# Altium PCB LPCOExtended.PcbDoc
Units mil, origin at the board's own origin, x right, y up, seen from the top; angles counter-clockwise.
Board outline 1970 x 1970 mil, 2 copper layers (Top Layer, Bottom Layer); 25 components, 29 nets, 93 pads, 23 vias.
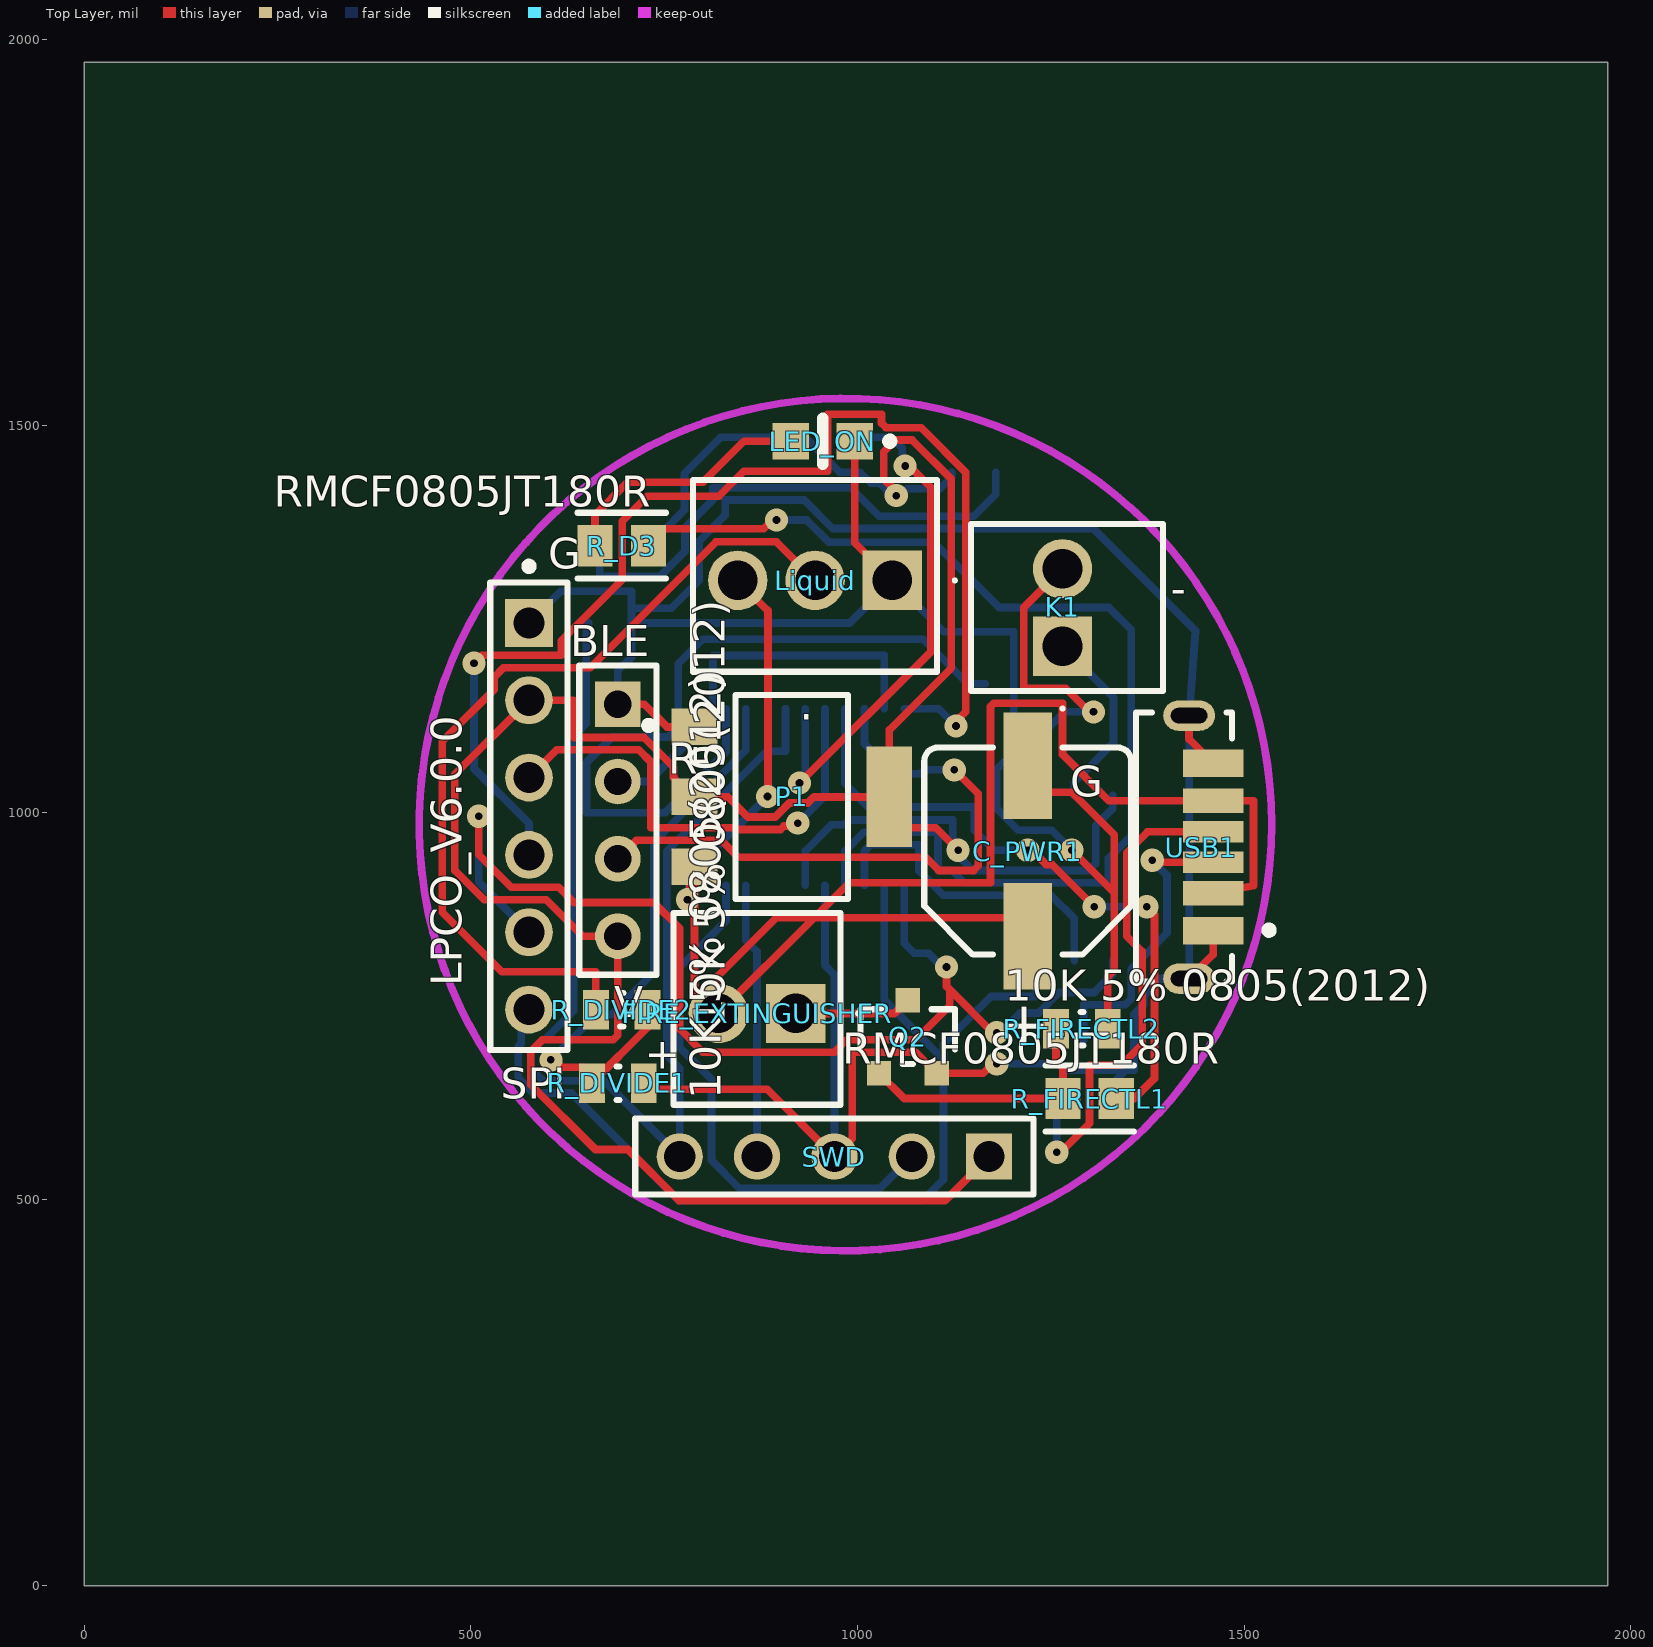
[diagram p0: Top Layer view]
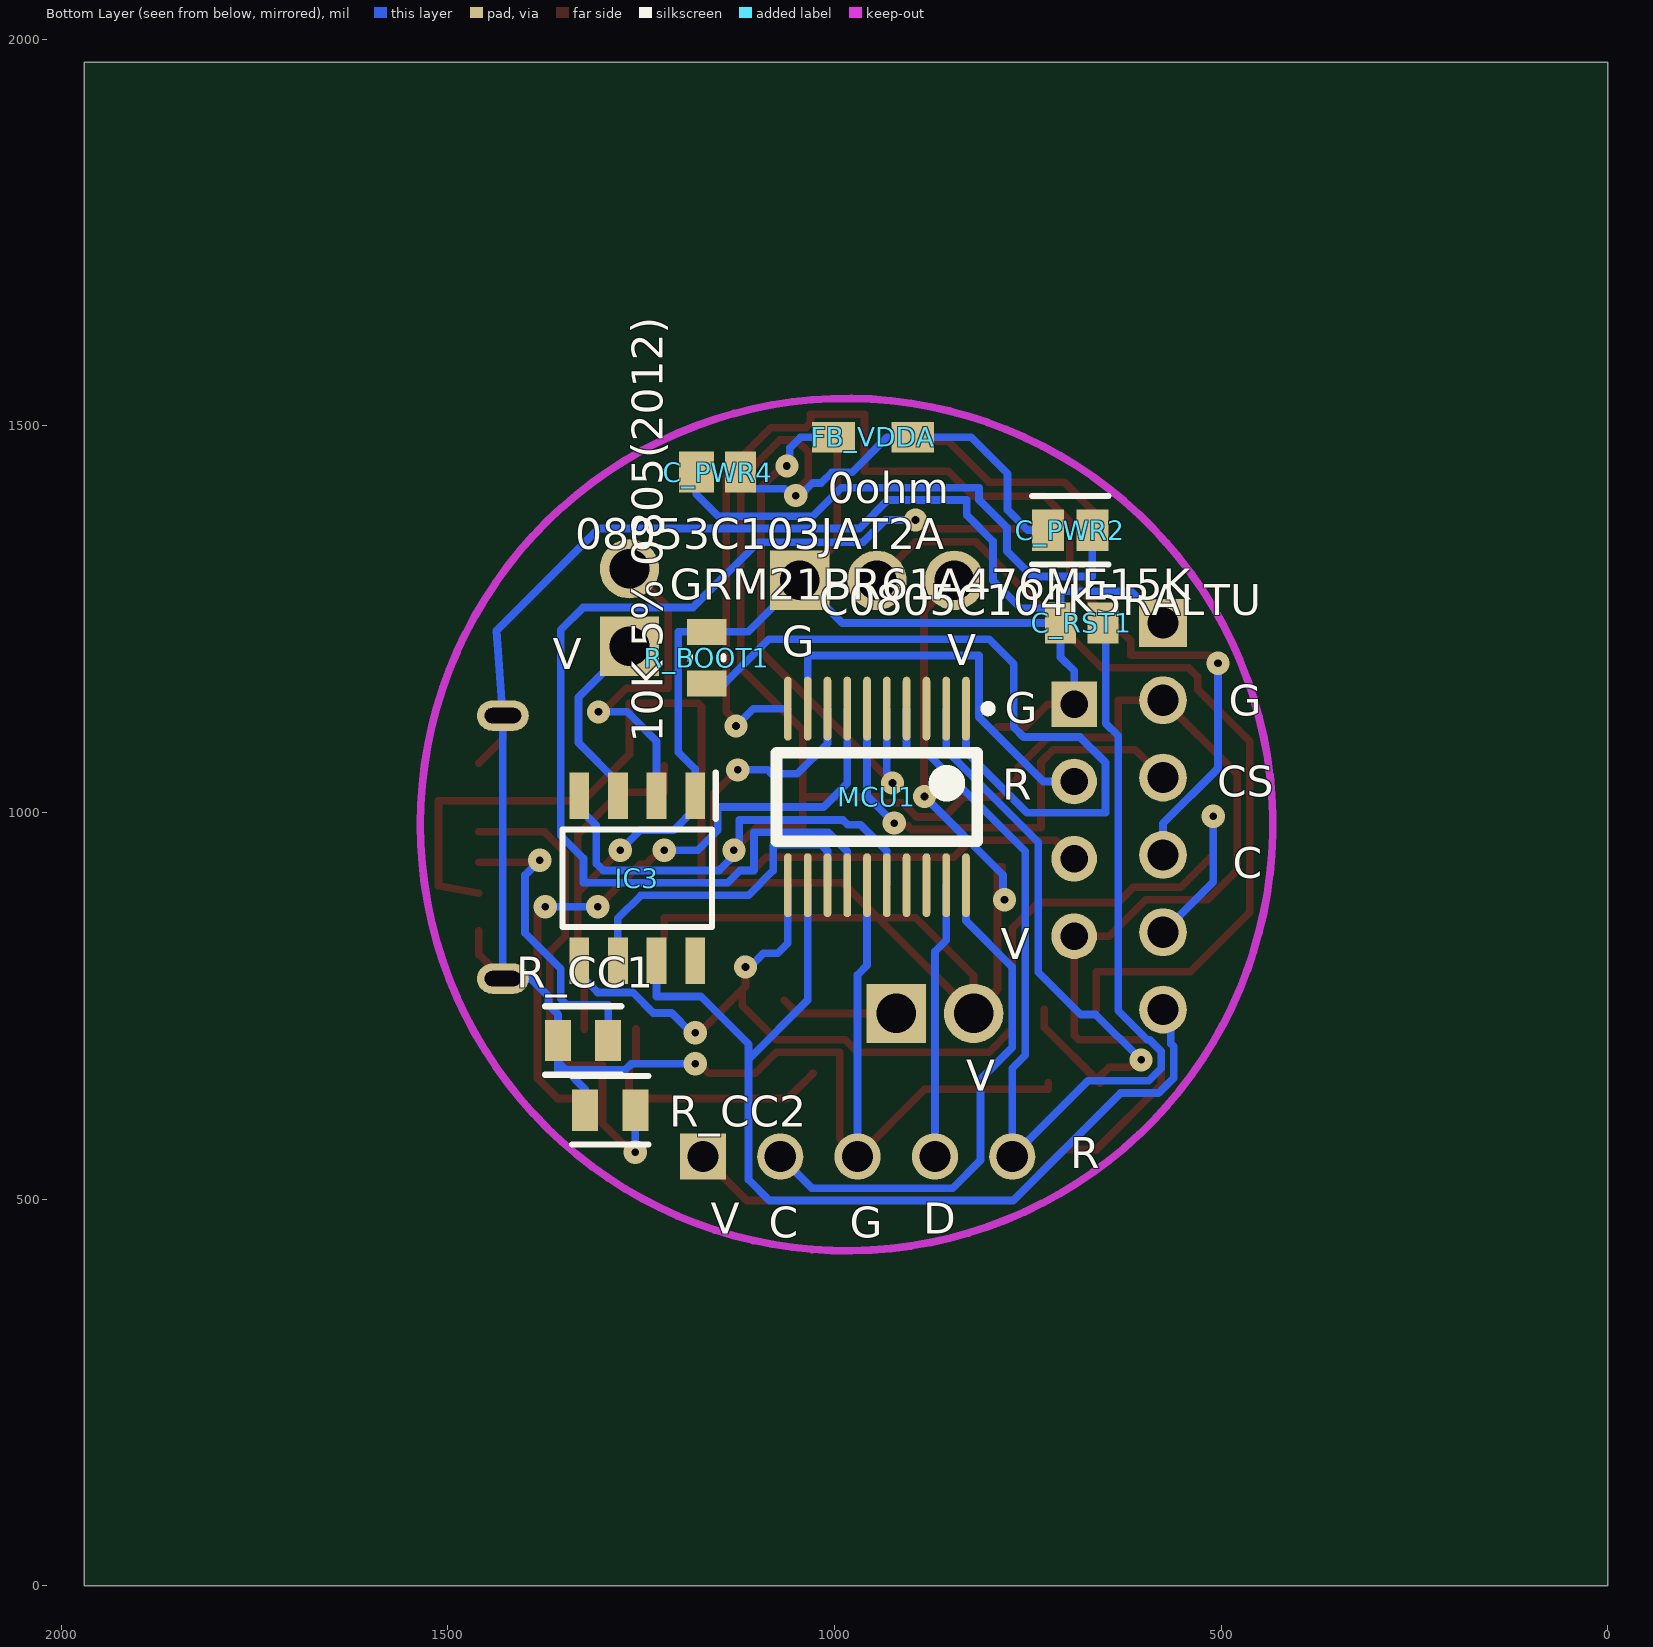
[diagram p1: Bottom Layer view, seen from below]
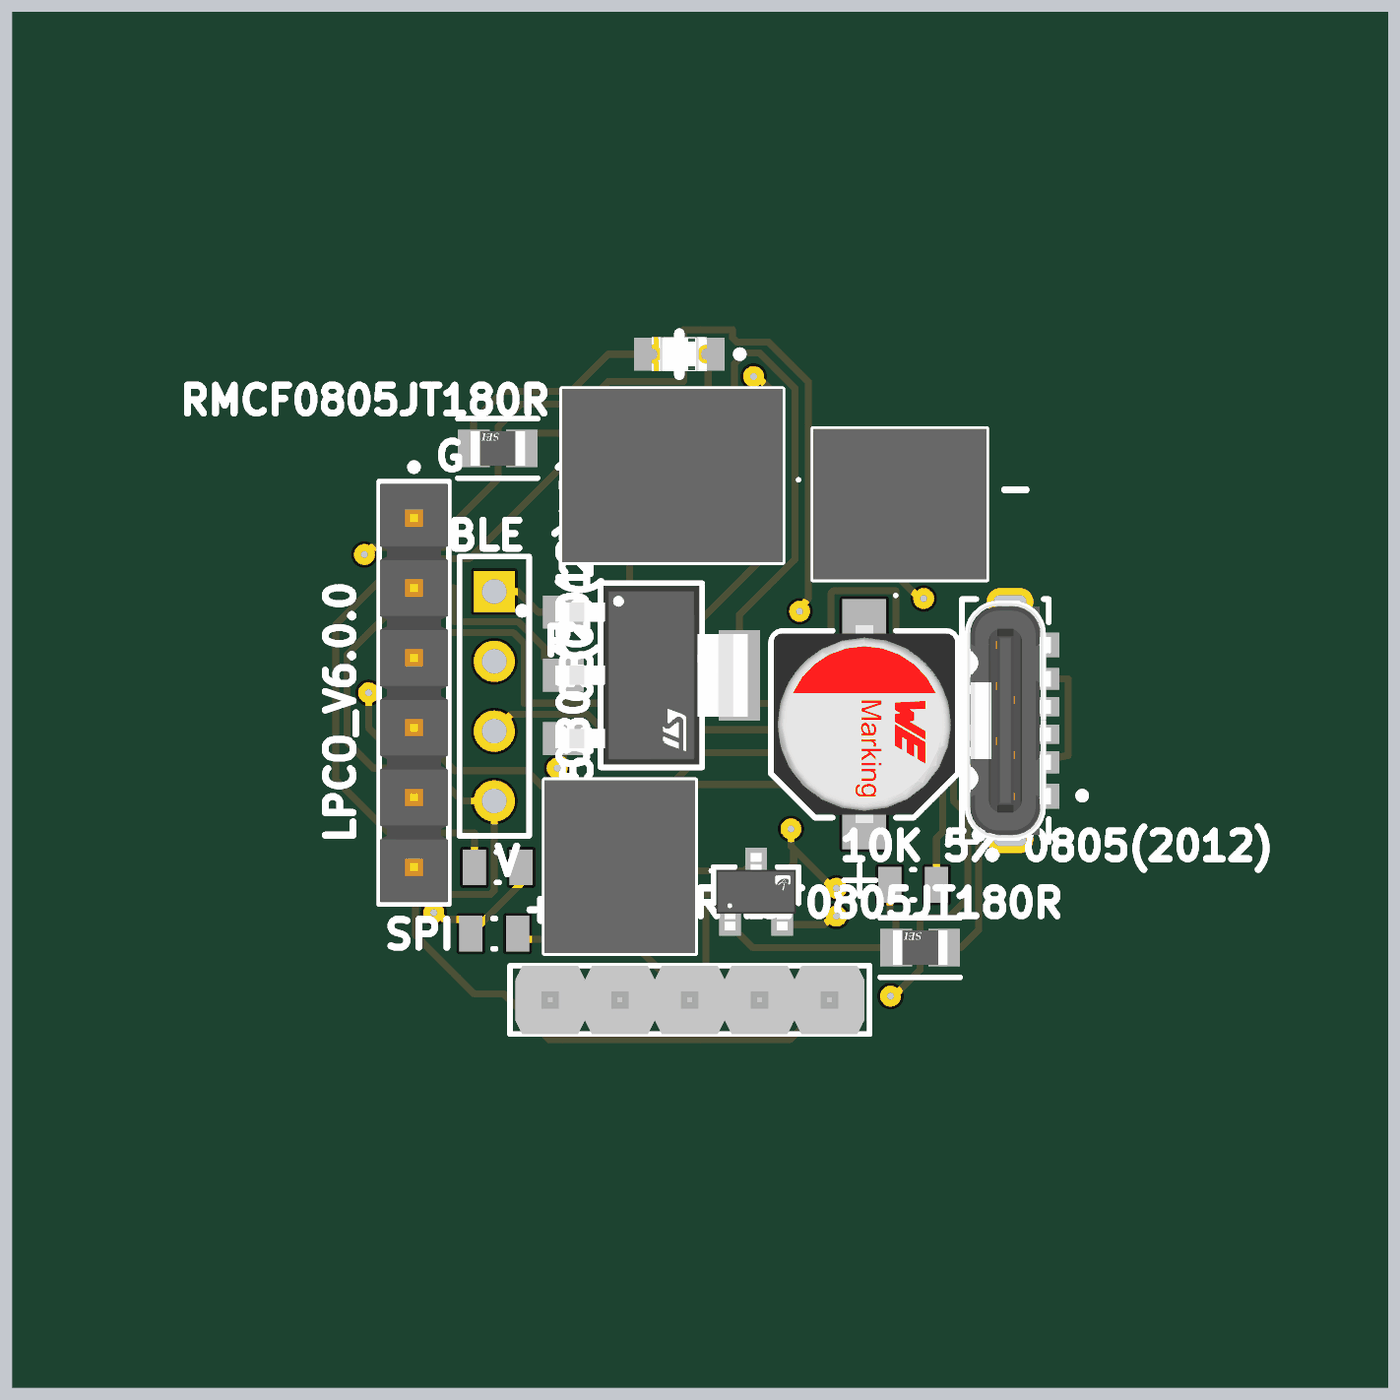
[diagram p2: 3D render of the assembled board from above, using the file's embedded part models]
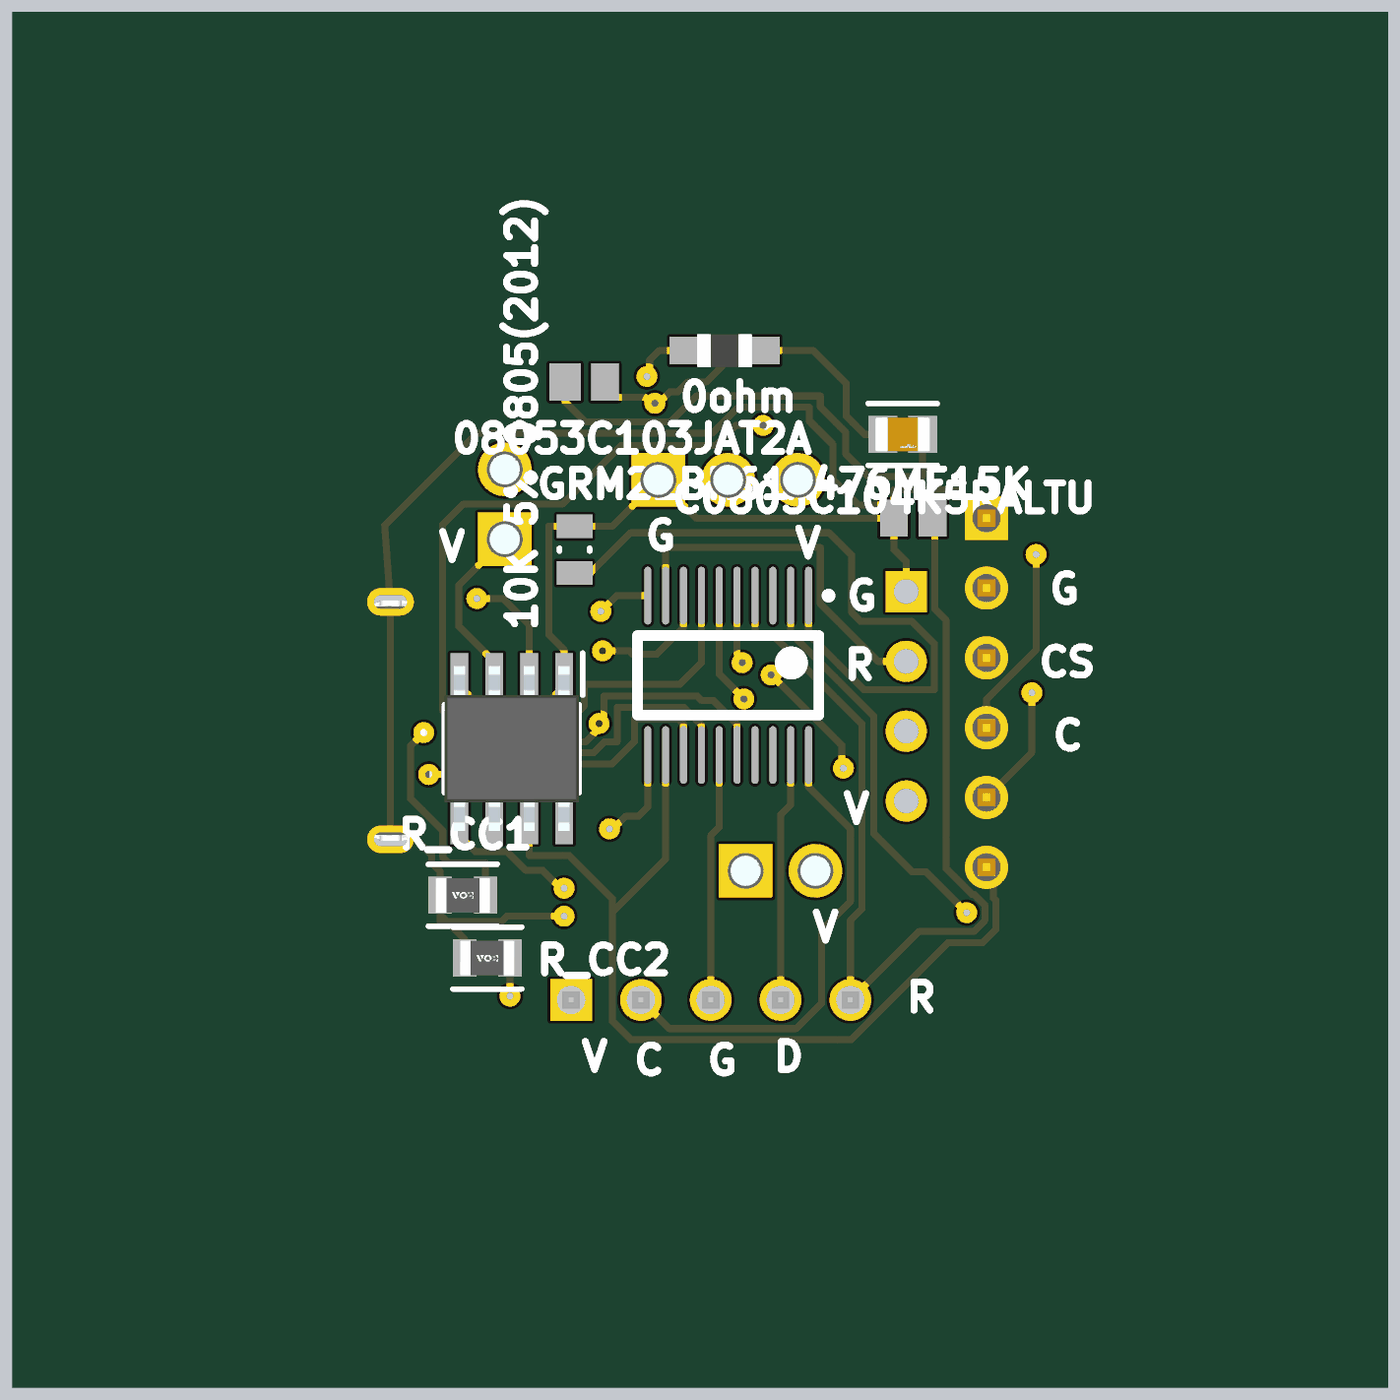
[diagram p3: 3D render of the assembled board from below, using the file's embedded part models]

## Layer stack, top to bottom
Top Solder: solder mask 0.4, Solder Resist, Dk 3.5
Top Layer: signal copper 1.4
Dielectric 1: dielectric 12.6, FR-4, Dk 4.8
Bottom Layer: signal copper 1.4
Bottom Solder: solder mask 0.4, Solder Resist, Dk 3.5

## Board outline
0,0 1970,0 1970,1970 0,1970

## Design rules (kind name [scope] priority, off if disabled: settings)
Clearance [All] p1: gap=6 ignorepadtopadclearanceinfootprint=FALSE except(10: Via-Via; 25: SMDPad-Via THPad-Via)
HoleSize [All] p1: absolutevalues=TRUE maxlimit=100 minlimit=6 maxpercent=80.000 minpercent=20.000
PolygonConnect [All] p1: connectstyle=Relief reliefconductorwidth=10 reliefentries=4 polygonreliefangle="90 Angle" airgapwidth=10
RoutingVias [All] p1: holewidth=10 width=30 viastyle="Through Hole" minholewidth=10 minwidth=30 maxholewidth=28 maxwidth=50
SolderMaskExpansion [All] p1: expansion=4 istentingtop=FALSE
Width [All] p1: maxlimit=30 minlimit=10 preferedwidth=10
29 further rules are at their usual default settings.

## Components (designator, comment, footprint, x,y, rotation, side; value= is the part's Value field where it differs from the comment)
BLE "Header BLE" HDR1X4 690,1140 r270 top
C_PWR1 "875585345004" WCAP-HSAH_D6.3H7.7 1220,950 r270 top
C_PWR2 "GRM21BR61A476ME15K" FP-GRM21B-0_2-e0_2_0_7-IPC_C 695,1365 r180 bottom
C_PWR4 "08053C103JAT2A" CAPC2013X94X50LL20T25 1150,1440 r180 bottom
C_RST1 "C0805C104K5RALTU" CAPC2013X88X50LL20T25 680,1245 r180 bottom
FB_VDDA "0ohm" WE-CBF_0805_L2W1.2H0.9_HC 950,1485 r180 bottom
FIRE_EXTINGUISHER "KF128-2.54-2P" KF1282542P 920,740 r180 top
IC3 "MAX31855JASA+" SOIC127P600X175-8N 1255,915 r270 bottom
K1 "KF128-2.54-2P" KF1282542P 1265,1215 r90 top
LED_ON "WHITE LED 3.0v20ma" FP-SML-LX0805UWC-TR-MFG 955,1480 r180 top
Liquid "KF128-2.54-3P" KF1282543P 1045,1300 r180 top
MCU1 "STM32F031F6P6TR" STM-TSSOP20_M 945,1020 r270 bottom
P1 "LD1117S33" FP-SOT-223-0046067_14-MFG 915,1020 r0 top
Q2 "AO3400A" FP-SOT23-MFG 1065,710 r90 top
R_BOOT1 "10K 5% 0805(2012)" RESC0805(2012)_L 1165,1200 r270 bottom value="10000.00 Ohm"
R_CC1 "RN73R2ATTD5101A05" FP-RN73R2A-IPC_C 1325,705 r0 bottom
R_CC2 "RN73R2ATTD5101A05" FP-RN73R2A-IPC_C 1290,615 r0 bottom
R_D3 "RMCF0805JT180R" FP-RMCF0805-IPC_B 695,1345 r180 top
R_DIVIDE1 "10K 5% 0805(2012)" RESC0805(2012)_L 690,650 r180 top value="10000.00 Ohm"
R_DIVIDE2 "10K 5% 0805(2012)" RESC0805(2012)_L 695,745 r180 top value="10000.00 Ohm"
R_FIRECTL1 "RMCF0805JT180R" FP-RMCF0805-IPC_B 1300,630 r180 top
R_FIRECTL2 "10K 5% 0805(2012)" RESC0805(2012)_L 1290,720 r180 top value="10000.00 Ohm"
SPI "HTSW-106-07-G-S" FP-HTSW-106-07-G-S-MFG 575,995 r270 top
SWD "MTLW-105-05-T-S-190" SMTC-MTLW-105-05-X-S-190 1170,555 r180 top
USB1 "217178-0001" FP-217178-0001-MFG 1422.01,955.16 r270 top

## Footprints (in the part's own frame and the unit in brackets; to place one, negate y for a bottom-side part, rotate by r counter-clockwise, add the part's x,y. Pads: shape width x height; smd on the part's side, far side on the other; paste and mask are expansions set on the pad)
CAPC2013X88X50LL20T25 [mil] "Chip Capacitor, 2-Leads, Body 2.00x1.25mm, IPC High Density"
  rect 40x53.15 smd: 1(-27.56,0) 2(27.56,0)
  body extent -43,-29 43,29, height 35
CAPC2013X94X50LL20T25 [mm] "Chip Capacitor, 2-Leads, Body 2.01x1.25mm, IPC High Density"
  rect 1.15x1.35 smd: 1(-0.725,0)
  rect 1.016x1.35 smd: 2(0.725,0)
  body extent -1.1,-0.72 1.1,0.72, height 0.94
FP-217178-0001-MFG [mm]
  rrect100% 1x1.7 hole 1.2 slot 0.5 at 0 deg paste-1000 mask+0: 1(-4.32,0.17) 2(4.32,0.17)
  rect 0.7x1.99 smd paste+0 mask+0: A5(0.5,0.965) B5(-0.5,0.965)
  rect 0.8x1.99 smd paste+0 mask+0: A9(-1.52,0.965) B9(1.52,0.965)
  rect 0.9x1.99 smd paste+0 mask+0: A12(-2.75,0.965) B12(2.75,0.965)
  silkscreen extent -4.42,-1.58 4.42,2.92, body extent -4.92,-1.68 4.92,2.06, height 0.25
FP-GRM21B-0_2-e0_2_0_7-IPC_C [mil]
  rect 41.52x53.39 smd paste+0 mask+0: 1(-28.57,0) 2(28.57,0)
  silkscreen extent -49,-44 49,44, body extent -39,-25 39,25, height 57
FP-HTSW-106-07-G-S-MFG [mm]
  rect 1.57x1.57 hole 1.02 paste-1000 mask+0: 1(-6.35,0)
  round 1.57 hole 1.02 paste-1000 mask+0: 2(-3.81,0) 3(-1.27,0) 4(1.27,0) 5(3.81,0) 6(6.35,0)
  silkscreen extent -8.33,-1.27 7.68,1.27, body extent -7.78,-1.37 7.78,1.37, height 0.25
FP-RMCF0805-IPC_B [mil]
  rect 45.46x53.63 smd paste+0 mask+0: 1(-34.48,0) 2(34.48,0)
  silkscreen extent -57,-43 57,43, body extent -67,-37 67,37, height 10
FP-RN73R2A-IPC_C [mil]
  rect 33.67x53.39 smd paste+0 mask+0: 1(-32.5,0) 2(32.5,0)
  silkscreen extent -49,-44 49,44, body extent -39,-25 39,25, height 24
FP-SML-LX0805UWC-TR-MFG [mm]
  rect 1.2x1.2 smd paste+0 mask+0: 1(-1.05,0) 2(1.05,0)
  silkscreen extent -2.33,-0.75 0,0.75, body extent -1.75,-0.85 1.75,0.85, height 0.25
FP-SOT23-MFG [mm]
  rect 0.8x0.8 smd paste+0 mask+0: 1(-1.2,0.95) 2(-1.2,-0.95) 3(1.2,0)
  silkscreen extent -0.9,-1.55 0.9,1.55, body extent -1.7,-1.78 1.7,1.78, height 0.25
FP-SOT-223-0046067_14-MFG [mm]
  rect 1.5x1.2 smd paste+0 mask+0: 1(-3.2,2.3) 2(-3.2,0) 3(-3.2,-2.3)
  rect 1.5x3.3 smd paste+0 mask+0: 4(3.2,0)
  silkscreen extent -4.82,-3.35 1.85,3.35, body extent -4.05,-3.45 4.05,3.45, height 0.25
HDR1X4 [mm] "Connector; Header; 4 Position"
  rect 1.5x1.5 hole 0.9: 1(0,0)
  round 1.5 hole 0.9: 2(2.54,0) 3(5.08,0) 4(7.62,0)
  silkscreen extent -1.27,-1.27 8.89,1.27
KF1282542P [mm]
  rect 1.95x1.95 hole 1.3: 1(0,0)
  round 1.95 hole 1.3: 2(2.54,0)
  silkscreen extent -2.1,-3.3 4.01,3, body extent -1.47,-3.3 4.01,3, height 9.2
KF1282543P [mm]
  rect 1.95x1.95 hole 1.3: 1(0,0)
  round 1.95 hole 1.3: 2(2.54,0) 3(5.08,0)
  silkscreen extent -2.1,-3.3 6.55,3, body extent -1.47,-3.3 6.55,3, height 9.2
RESC0805(2012)_L [mm] "Chip Resistor, Body 2.0x1.3mm, IPC High Density"
  rect 0.85x1.3 smd: 1(-0.85,0) 2(0.85,0)
  silkscreen extent -0.05,-0.55 0.05,0.55, body extent -1.1,-0.67 1.1,0.68, height 0.7
SMTC-MTLW-105-05-X-S-190 [mm] "Terminal Assembly, 1x5 Pins, Vertical, 2.54mm Pitch, Male"
  rect 1.52x1.52 hole 1.02: 1(0,0)
  round 1.52 hole 1.02: 2(2.54,0) 3(5.08,0) 4(7.62,0) 5(10.16,0)
  silkscreen extent -1.46,-1.24 11.62,1.24, body extent -1.27,-1.24 11.43,1.24, height 6.35
SOIC127P600X175-8N [mm]
  rect 1.525x0.65 smd: 1(-2.712,1.905) 2(-2.712,0.635) 3(-2.712,-0.635) 4(-2.712,-1.905) 5(2.712,-1.905) 6(2.712,-0.635) 7(2.712,0.635) 8(2.712,1.905)
  silkscreen extent -3.47,-2.45 1.6,2.58, body extent -3,-2.45 3,2.45, height 1.75
STM-TSSOP20_M [mm] "SOP, 20-Leads, Body 6.6x4.5mm, Pitch 0.65mm, IPC Low Density"
  oval 2.1x0.254 smd: 1(-2.9,2.925) 2(-2.9,2.275) 3(-2.9,1.625) 4(-2.9,0.975) 5(-2.9,0.325) 6(-2.9,-0.325) 7(-2.9,-0.975) 8(-2.9,-1.625) 9(-2.9,-2.275) 10(-2.9,-2.925) 11(2.9,-2.925) 12(2.9,-2.275) 13(2.9,-1.625) 14(2.9,-0.975) 15(2.9,-0.325) 16(2.9,0.325) 17(2.9,0.975) 18(2.9,1.625) 19(2.9,2.275) 20(2.9,2.925)
  silkscreen extent -3.02,-3.3 1.45,3.77, body extent -2.25,-3.3 2.25,3.3, height 1.2
WCAP-HSAH_D6.3H7.7 [mm] "Aluminum Hybrid Polymer Capacitor, SMT, body diameter 6.3mm"
  rect 3.5x1.6 smd: 1(2.8,0) 2(-2.8,0)
  silkscreen extent -3.4,-3.4 3.4,3.4, body extent -3.6,-3.3 3.6,3.3, height 7.75
WE-CBF_0805_L2W1.2H0.9_HC [mm] "SMD EMI Suppression Ferrite  Bead, body 2.00x1.20mm"
  rect 1.4x1 smd: 1(-1.3,0) 2(1.3,0)
  body extent -1,-0.6 1,0.6, height 0.9

## Part data
BLE: library part "Header 4", "Header, 4-Pin", LatestRevisionDate=17-Jul-2002, LatestRevisionNote="Re-released for DXP Platform.", Publisher="Altium Limited"
C_PWR1: library part CMP-03913-134709175-2, "Cap, 220Uf, 16V, Alu Elec, Hybrid, Smd Rohs Compliant: Yes", Capacitance=220µF, ESR (Equivalent Series Resistance)=30mΩ, Leakage Current=35.2µA, Max Operating Temperature=125°C, Min Operating Temperature=-55°C, Ripple Current=1.4A, Voltage Rating=16V, Diameter=6.3mm, Length=7.7mm, RoHS=Compliant, Width=6.5mm
C_PWR2: library part CMP-06035-042633-1, "Chip Multilayer Ceramic Capacitors for General Purpose, 0805, 47uF, X5R, 15%, 20%, 10V", Capacitance=47uF, Case Code (Imperial)=0805, Case Code (Metric)=2012, Dielectric=X5R, Max Operating Temperature=85°C, Min Operating Temperature=-55°C, Package Quantity=10000, Tolerance=20%, Voltage Rating=10V, Case/Package=0805, Length=0.079inch, Mount="Surface Mount", Packaging="Tape and Reel", Termination=SMD/SMT, Thickness=0.057inch, Voltage Rating (DC)=10V, Weight=0.000335oz, Width=0.049inch
C_PWR4: library part CMP-2007-04234-1, Manufacturer="AVX Interconnect / Elco", Part Number=08053C103JAT2A
C_RST1: library part CMP-2007-00280-1, Manufacturer=Kemet, Part Number=C0805C104K5RALTU
FB_VDDA: library part CMP-0220-00029-2, Case Code (Imperial)=0805, Case Code (Metric)=2012, Case/Package=SMD/SMT, Current Rating=2A, DC Resistance (DCR)=50mΩ, Inductance=5.6H, Max Operating Temperature=125°C, Min Operating Temperature=-55°C, Test Frequency=100MHz, Tolerance=25%, Core Material=Ferrite, Depth=1.2mm, Height=900µm, Impedance=220Ω, Lead Free="Lead Free", Length=2mm, Material=Ferrite, Max Current Rating=2A, Max DC Current=2A, Mount="Surface Mount", NexarPartId=7861696, Number of Lines=1, Packaging=Digi-Reel®, REACH SVHC=Unknown, Resistance=50mΩ, RoHS=Compliant, Termination=SMD/SMT, Weight=10.999615mg, Width=1.2mm
FIRE_EXTINGUISHER K1 Liquid: "Connector", Manufacturer_Name="CIXI KEFA ELECTRONICS", Datasheet Link=https://jirorwxhqiillo5p.ldycdn.com/KF128-2.54-aidqpBpqKirRliSqmrqirlki.pdf, Height=9.1mm
  FIRE_EXTINGUISHER K1: Manufacturer_Part_Number=KF128-2.54-2P
  Liquid: Manufacturer_Part_Number=KF128-2.54-3P
IC3: "Integrated Circuit", Manufacturer_Name="Analog Devices", Mouser Part Number=700-MAX31855JASA+, Arrow Part Number=MAX31855JASA+, Arrow Price/Stock=https://www.arrow.com/en/products/max31855jasa/analog-devices?utm_currency=USD&region=nac, Datasheet Link=https://datasheets.maximintegrated.com/en/ds/MAX31855.pdf, Height=1.75mm, Manufacturer_Part_Number=MAX31855JASA+, Mouser Price/Stock=https://www.mouser.co.uk/ProductDetail/Analog-Devices-Maxim-Integrated/MAX31855JASA%2b?qs=4Rc5iGDDRGgfomCSqMwnEw%3D%3D
LED_ON: library part CMP-00229-00139794-1, "SML-LX0805UWC-TR White LED, 0805 Diffused, Rectangle Lens SMD package", Case/Package=0805, Forward Current=20mA, Forward Voltage=3.5V, Illumination Color=White, Lens Color="Clear, Yellow", Max Operating Temperature=85°C, Min Operating Temperature=-40°C, Power Rating=120mW, Approvals="CSA, UL", Luminous Intensity=150mcd, Mount="Surface Mount", NexarPartId=139794, Number of LEDs=1, RoHS=Compliant, Viewing Angle=120°
MCU1: library part CMP-0304-00079-4, "ARM Cortex-M0 32-bit MCU, 32 KB Flash, 4 KB Internal RAM, 15 I/Os, 20-Pin TSSOP, -40 to 85 degC, Tape and Reel", I/Os (High Current)=15, Manufacturer=STMicroelectronics, Operating Frequency(F) (Processor speed) (MHz)=48, Package Description="20-Pin Thin Shrink Small Outline Package, Body 6.5 x 4.4 mm, Pitch 0.65 mm", Package Reference=TSSOP20, Supply Voltage(Vcc) min (V)=2, ComponentLink1Description="Manufacturer URL", ComponentLink1URL=http://www.st.com/, ComponentLink2Description=Datasheet, ComponentLink2URL=http://www.st.com/st-web-ui/static/active/en/resource/technical/document/datasheet/DM00104043.pdf, Core="ARM Cortex-M0", DatasheetVersion="Rev. 3", FLASH Size (Prog) (kB)=32, Internal RAM Size (kB)=4, Mounting Technology="Surface Mount", Packing="Tape and Reel", PartNumber=STM32F031F6P6TR
P1: library part CMP-0244-00307-2, "IC REG LINEAR 3.3V 800MA SOT223", Case/Package=SOT-223, Dropout Voltage=1.1V, Input Bias Current=5mA, Max Input Voltage=15V, Max Operating Temperature=125°C, Max Output Current=1.3A, Max Output Voltage=3.3V, Max Power Dissipation=12W, Min Input Voltage=5.3V, Min Operating Temperature=-40°C, Output Current=950mA, Output Voltage Accuracy=1%, Package Quantity=1, Quiescent Current=10mA, Accuracy=1%, Contact Plating=Tin, Height=1.8mm, Lead Free="Lead Free", Length=6.5mm, Max Supply Voltage=15V, Min Output Voltage=3.3V, Min Supply Voltage=3.3V, Mount="Surface Mount", Nominal Output Voltage=3.3V, Number Of Outputs=1, Number of Pins=4, Number of Regulators=1, Number of Terminals=4, Output Type=Fixed, Output Voltage=3.3V, Packaging="Tape and Reel", Polarity=Positive, Power Dissipation=12W, Radiation Hardening=No, REACH SVHC="No SVHC", Termination=SMD/SMT, Weight=0.01lb, Width=3.5mm
Q2: library part CMP-83955-000006-1, "MOSFET N-CH 30V 5.7A SOT23", Case/Package=SOT-23, Continuous Drain Current (ID)=5.7A, Drain to Source Voltage (Vdss)=30V, Gate to Source Voltage (Vgs)=12V, Input Capacitance=630pF, Max Operating Temperature=150°C, Max Power Dissipation=1.4W, Min Operating Temperature=-55°C, Lead Free="Lead Free", Mount="Surface Mount", Number of Elements=1, Number of Pins=3, Packaging="Tape and Reel", Power Dissipation=1.4W, Radiation Hardening=No, Rds On Max=26.5mR
R_BOOT1 R_DIVIDE1 R_DIVIDE2 R_FIRECTL2: library part CMP-1013-00098-1, "10K 0.125W 5% 0805 (2012 Metric)  SMD", Case-EIA=0805, Case-Metric=2012, Power="0.125 W", Tolerance="5 %", Technology=SMT
R_CC1 R_CC2: library part CMP-04015-014497-1, "5.1kΩ ±0.05% 0.125W, 1/8W Chip Resistor 0805 (2012 Metric) Moisture Resistant Thin Film"
R_D3 R_FIRECTL1: library part CMP-26527-003283-1, "180Ω ±5% 0.125W 0805 Thick Film Chip Resistor AEC-Q200 compliant", Case Code (Imperial)=0805, Case Code (Metric)=2012, Max Operating Temperature=155°C, Max Power Dissipation=125mW, Min Operating Temperature=-55°C, Resistance=180R, Resistor Type="Thick Film", Temperature Coefficient=200ppm/°C, Tolerance=5%, Case/Package=0805, Construction=Rectangular, Contact Plating=Tin, Depth=1.25mm, Features="Automotive AEC-Q200", Height=0.026inch, Lead Free="Lead Free", Length=0.079inch, Military Standard=Not, Mount="Surface Mount", Number of Terminations=2, Packaging="Tape and Reel", Radiation Hardening=No, RoHS Compliant=Yes, Series=RMCF, Width=0.049inch
SPI: library part CMP-02766-001515-1, "CONN HEADER VERT 6POS 2.54MM", Color=Natural, Flammability Rating="UL94 V-0", Max Current Rating=7.6A, Max Operating Temperature=125°C, Max Voltage Rating (AC)=550V, Min Operating Temperature=-55°C, Connector Type=Header, Contact Finish - Mating=GOLD, Contact Material=Bronze, Contact Mating Length=0.23inch, Contact Plating=Gold, Contact Shape=Square, Contact Type="Male Pin", Depth=2.48mm, Fastening Type=Pull, Gender=Male, Housing Color=Natural, Housing Material=Polymer, Insulation Color=Natural, Insulation Material=Polymer, Lead Free="Lead Free", Length=15.24mm, Mount="Through Hole", Number of Contacts=6, Number of Positions=6, Number of Rows=1, Orientation=Straight, Packaging=Rail/Tube, Pitch=0.1inch, Radiation Hardening=No, REACH SVHC="No SVHC", RoHS Compliant=Yes, Series=HTSW, Termination=Solder
SWD: library part CMP-1024-00077-1, "Low Profile .025\" SQ Post Header, Through-hole, Vertical, -55 to 105 degC, 2.54 mm Pitch, 5-Pin, Male, RoHS", Manufacturer=Samtec, Temperature Range="-55 to 105 degC", ComponentLink1Description="Manufacturer URL", ComponentLink1URL=http://www.samtec.com, ComponentLink2Description=Datasheet, ComponentLink2URL=http://www.samtec.com/documents/webfiles/pdf/MTLW_TH.PDF, ComponentLink3Description="Package Specification", ComponentLink3URL=http://www.samtec.com/documents/webfiles/cpdf/MTLW-1XX-XX-XX-X-XXX-XX-XX-MKT1.pdf, DatasheetVersion=F-214, Mounting Technology=Through-hole, Orientation=Vertical, PackageDescription="Low Profile Terminal Assembly", PackageReference=MTLW-105-05-X-S-190, PackageVersion="T, 6/1991", PartNumber=MTLW-105-05-T-S-190, Pitch="2.54 mm", RoHS=True
USB1: library part CMP-04767-000032-1, "CONN RCPT USB2.0 TYP C 24POS SMD"

## Via types
v1: diameter 30, hole 10, Top Layer to Bottom Layer, 23 vias

## Nets (pads, with @x,y where several pads share a name; then routed paths per layer and width w, separated by ;. In a path a pad name is that pad's centre, name@x,y a point inside that pad or via, vN(x,y) a via of type N, cw(c..) or ccw(c..) an arc to the next point about the centre after c; other vN are vias at no path point)
3V3: BLE.4 C_PWR2.1 C_PWR4.2 FB_VDDA.2 IC3.4 MCU1.16 P1.2 P1.4 SPI.2 SWD.1 | length 3931.5
  Top Layer w10: v1(1049.9,1409.66) 1049.9,1415.07 1033.95,1431.03 1033.95,1466.26 1049.18,1481.49 1070.72,1481.49 1121,1431.21 1121,1186.49 1040.98,1106.47 P1.4 ; v1(1130,951) 1101,980 1040.98,980 P1.4 ; SWD.1 1113,498 769.13,498 703.13,564 661,564 577.33,647.67 577.33,690.77 592.56,706 684.14,706 690,711.86 BLE.4 644.47,840 597.47,887 517.19,887 479.2,924.99 479.2,1049.2 SPI.2 633,1145 633,1097 723.63,1097 762,1058.63 762,1045 787,1020 P1.2 832,1020 858,994 893.67,994 911.79,1012.12 935.77,1012.12 943.65,1020 P1.4
  Bottom Layer w10: C_PWR2.1 750,1365 776,1391 776,1438 823,1485 FB_VDDA.2 932,1485 977,1440 1003,1440 1016.87,1426.13 1028.03,1426.13 1044.49,1409.66 v1(1049.9,1409.66) ; MCU1.16 932.2,950 966.2,984 982.82,984 988.99,990.17 1123,990.17 v1@1123,951 ; v1@1050,1410 1055.65,1410 1064.08,1418.43 1106.46,1418.43 1121.46,1433.43 C_PWR4.2 ; v1(1130,951) v1@1123,951 ; IC3.4 1330,1005 1308,983 1308,934 1299,925 1149,925 1126.5,947.5 v1@1123,951
5V: C_PWR1.1 FIRE_EXTINGUISHER.2 Liquid.3 P1.3 USB1.A9 USB1.B9 | length 2473.3
  Top Layer w10: v1(780,887) 783,890 783,929.45 P1.3 789.02,770.98 FIRE_EXTINGUISHER.2 ; Liquid.3 884,1261 884,1021.1 v1(883.45,1020.55) ; C_PWR1.1 1220,863.76 943.76,863.76 ; USB1.B9 1512,905.32 1512,1015 USB1.A9 1325,1015 1265,1075 1265,1141 1176,1141 1172,1137 1172,909 989,909 943.76,863.76 ; FIRE_EXTINGUISHER.2 943.76,863.76 ; FIRE_EXTINGUISHER.2 820,789 894.76,863.76 943.76,863.76
  Bottom Layer w10: v1(780,887) 782.05,889.05 782.05,919.15 v1(883.45,1020.55)
FIRE_EXT: MCU1.7 R_FIRECTL1.1 | length 857.4
  Top Layer w10: v1(1220,951) 1225.41,951 1243.66,932.75 1251.25,932.75 v1(1306,878) ; R_FIRECTL1.1 1358,630 1384,656 1384,868 v1(1374,878)
  Bottom Layer w10: MCU1.7 983.39,1037.61 1014,1007 1151,1007 1151,976.86 1176.86,951 v1(1220,951) ; v1(1306,878) v1(1374,878)
FIRE_EXT_FET: Q2.1 R_FIRECTL1.2 R_FIRECTL2.2 | length 345.2
  Top Layer w10: Q2.1 1060.35,630 R_FIRECTL1.2 1265.52,670 1256.54,678.98 R_FIRECTL2.2
GND: BLE.1 C_PWR1.2 C_RST1.1 IC3.1 LED_ON.1 Liquid.1 MCU1.15 P1.1 Q2.2 R_BOOT1.1 R_CC1.2 R_CC2.2 R_DIVIDE1.1 R_FIRECTL2.1 SPI.1 SWD.3 USB1.1 USB1.2 USB1.A12 USB1.B12 | length 4936.4
  Top Layer w10: BLE.1 724,1140 753.45,1110.55 P1.1 ; R_DIVIDE1.1 723.46,642 883,642 SWD.3 993,578 993,690 1075.16,690 Q2.2 1162.34,662.76 1174.59,675 v1(1180,675) ; LED_ON.1 996.34,1348.66 Liquid.1 ; C_PWR1.2 1220,1026 1277,1026 1332,971 1332,896 ; v1(1277,951) 1332,896 ; R_FIRECTL2.1 1323.46,787.53 1332,796.07 1332,896 ; USB1.2 1460,816.38 USB1.B12 ; USB1.1 1428.7,1094.73 USB1.A12
  Bottom Layer w10: SPI.1 616,1286 707.56,1286 C_RST1.1@707.56,1264 ; BLE.1 690,1183 707.56,1200.56 C_RST1.1 ; MCU1.15 957.8,802.2 970,790 SWD.3 ; v1(1180,675) 1262.46,675 1270.46,667 1347.5,667 ; v1(1277,951) 1251,977 1208,977 1180,1005 IC3.1 1180,1056 1202,1078 1202,1233.46 R_BOOT1.1 1111.54,1233.46 Liquid.1 990,1245 C_RST1.1 ; R_CC2.2 1322.5,642 1347.5,667 ; USB1.1 USB1.1@1429,1125.24 ; C_RST1.1 C_RST1.1@707.56,1264 ; C_RST1.1@707.56,1264 759,1264 795,1300 795,1350.6 829,1384.6 829,1404 931,1404 968,1367 1305,1367 1437,1235 USB1.1@1429,1125.24 ; 1347.5,667 1357.5,667 1357.5,677 ; 1347.5,667 1357.5,677 ; 1357.5,677 R_CC1.2 1357.5,738.75 1369.8,751.04 1369.8,762.3 1392.58,785.08 USB1.2 1429,785.08 USB1.1@1429,1125.24
I2C1_SCL: MCU1.17
I2C1_SDA: MCU1.18
IND_LED: MCU1.14 R_D3.1 | length 1489.4
  Top Layer w10: R_D3.1 729.48,1349.08 747.21,1366.81 878.4,1366.81 889.59,1378 v1(895,1378)
  Bottom Layer w10: v1(895,1378) 934.37,1378 962.99,1349.39 1098.61,1349.39 1183,1265 1325,1265 1354,1236 1354,970 1324.54,940.54 1324.54,909 1138,909 1122,925 1104,925 1104,974.17 1008.18,974.17 983.39,949.38 MCU1.14
LIQ: Liquid.2 R_DIVIDE2.2 | length 1119.4
  Top Layer w10: R_DIVIDE2.2 661.54,794 540,794 463,871 463,1092 530,1159 530,1175 542.09,1187.09 654.09,1187.09 817,1350 895,1350 Liquid.2
LIQ_SIG: MCU1.2 R_DIVIDE1.2 R_DIVIDE2.1 | length 765.7
  Top Layer w10: v1(603.33,680) 608.74,680 618.15,670.59 644.8,670.59 656.54,658.86 R_DIVIDE1.2 728.46,721.93 R_DIVIDE2.1
  Bottom Layer w10: v1(603.33,680) 661.88,738.55 681.55,738.55 736.27,793.27 736.27,961.46 855.43,1080.62 MCU1.2
NetC_PWR2_2: C_PWR2.2 C_PWR4.1 | length 702.3
  Bottom Layer w10: C_PWR2.2 666.43,1305 744,1305 776.84,1337.84 776.84,1368.16 813,1404.32 813,1420 991,1420 1028,1383 1150,1383 1178.54,1411.54 C_PWR4.1
NetFIRE_EXTINGUISHER_1: FIRE_EXTINGUISHER.1 Q2.3 | length 152.1
  Top Layer w10: FIRE_EXTINGUISHER.1 1047.76,740 Q2.3
NetLED_ON_2: LED_ON.2 R_D3.2 | length 332.5
  Top Layer w10: R_D3.2 660.52,1385.03 702.49,1427 800,1427 853,1480 LED_ON.2
NetMCU1_1: MCU1.1 R_BOOT1.2 | length 987.3
  Bottom Layer w10: MCU1.1 829.84,1078.37 750.94,999.47 649.47,999.47 649.47,1064.47 682.5,1097.5 755.5,1097.5 768,1110 768,1192 800,1224 1085,1224 1142.46,1166.54 R_BOOT1.2
NetR_CC1_1: R_CC1.1 USB1.A5 | length 396.8
  Top Layer w10: v1(1381,938) 1383.53,935.47 USB1.A5
  Bottom Layer w10: R_CC1.1 1292.5,751.21 1346,751.21 1353.8,759 1353.8,797.7 1400,843.91 1400,919 v1(1381,938)
NetR_CC2_1: R_CC2.1 USB1.B5 | length 646
  Top Layer w10: v1(1257.5,560.5) 1262.5,560.5 1300,598 1300,673 1341,673 1368,700 1368,820 1348,840 1348,947.84 1375,974.84 USB1.B5
  Bottom Layer w10: v1(1257.5,560.5) R_CC2.1
NRST: C_RST1.2 MCU1.4 SWD.5 | length 1514.2
  Bottom Layer w10: C_RST1.2 652.44,1242 649,1242 649,1115 633,1099 633,743.74 595.26,706 592.56,706 577.33,690.77 577.33,669.23 593.56,653 672,653 SWD.5 770,669 753.19,685.81 753.19,949.6 882.59,1079 906.61,1079 MCU1.4
SPI1_CS1: IC3.6 MCU1.13 | length 432.3
  Bottom Layer w10: MCU1.13 1008.98,950.14 1017,958.17 1079,958.17 1079,925 1111,893 1250,893 1280,863 IC3.6
SPI1_CS2: MCU1.6 SPI.3 | length 621
  Top Layer w10: SPI.3 611,1081 717,1081 732.81,1065.19 732.81,980.07 839.72,980.07 841.79,978 900.3,978 904.59,982.29 918.73,982.29 v1(922.56,986.12)
  Bottom Layer w10: v1(922.56,986.12) 957.8,1021.35 MCU1.6
SPI1_CS3: MCU1.10 SPI.4 | length 1593.2
  Top Layer w10: v1(504,1193) 514.09,1203.09 616.91,1203.09 616.91,1221.91 695.75,1300.75 695.75,1376.37 728.07,1408.68 820.68,1408.68 853,1441 961,1441 961,1515 1031,1515 1031,1503.35 1036.86,1497.49 1082.14,1497.49 1140,1439.63 1140,1130 1131.19,1121.19 1131.19,1115.49 v1(1127.37,1111.66)
  Bottom Layer w10: v1(504,1193) 504,1056.74 575,985.74 SPI.4 ; MCU1.10 1104.85,1134.17 v1(1127.37,1111.66)
SPI1_MISO: IC3.7 MCU1.12 SPI.6 | length 1343
  Bottom Layer w10: SPI.6 565.09,735.09 565.09,701.15 561.33,697.4 561.33,656.53 580.86,637 630,637 769,498 1084,498 1111,525 1111,681 ; MCU1.12 1034.57,757.43 1111,681 ; IC3.7 1230,762 1173,762 1111,700 1111,681
SPI1_SCK: IC3.5 MCU1.11 SPI.5 | length 1531.2
  Top Layer w10: v1(510,995) 510,945.12 552.02,903.09 613.38,903.09 633,883.47 736.53,883.47 770,850 770,720 800,690 970,690 986,706 1075,706 1119,750 1119,771 ; v1(1115,800) 1115,775 1119,771 ; v1(1180,715) 1175,715 1119,771
  Bottom Layer w10: v1(510,995) 510,910 SPI.5 ; MCU1.11 1060.16,831 1073.19,817.97 1091.62,817.97 1109.59,800 v1(1115,800) 1118.83,803.83 1118.83,809.83 v1@1119,810 ; v1(1180,715) 1185,715 1210.52,740.52 1234.31,740.52 1261,767.21 1306.21,767.21 1330,791 IC3.5
SWCLK: MCU1.20 SWD.2 | length 688.5
  Bottom Layer w10: MCU1.20 829.84,859.84 770,800 770,696 811,655 811,550 847,514 1029,514 SWD.2
SWDIO: MCU1.19 SWD.4 | length 356.9
  Bottom Layer w10: MCU1.19 855.43,834.57 870,820 SWD.4
T+: IC3.3 K1.1 | length 241.7
  Bottom Layer w10: K1.1 1331,1149 1331,1090 1280,1039 IC3.3
T-: IC3.2 K1.2 | length 438.8
  Top Layer w10: K1.2 1215,1265 1215,1160.52 1269.14,1160.52 1299.66,1130 v1(1305,1130)
  Bottom Layer w10: IC3.2 1230,1092 1268,1130 v1(1305,1130)
UART2_RX: BLE.2 MCU1.9 | length 527.8
  Bottom Layer w10: BLE.2 730,1040 813,1123 813,1203 1034.57,1203 MCU1.9
UART2_TX: BLE.3 MCU1.8 | length 811
  Top Layer w10: BLE.3 714.07,964.07 823.72,964.07 845.79,942 1088,942 1105,925 1150.14,925 1156,930.86 1156,1024 v1(1125,1055)
  Bottom Layer w10: MCU1.8 1008.98,1089 1047.98,1050 1081.28,1050 1086.28,1055 v1(1125,1055)
VDDA: FB_VDDA.1 MCU1.5 | length 683.3
  Top Layer w10: v1(925,1038.12) 1095,1208.12 1095,1419.77 1066.81,1447.96 v1(1061.46,1447.96)
  Bottom Layer w10: v1(925,1038.12) 925,1043.53 932.2,1050.74 MCU1.5 ; FB_VDDA.1 1043.74,1485 1057.63,1471.11 1057.63,1451.78 v1(1061.46,1447.96)
pads on no net: IC3.8 MCU1.3

## Keep-outs
Keep-Out Layer:
  circle w10: c984.25,984.25 r551.18

## Silkscreen, mask and mechanical layers (free items; w line width, h text height)
Top Overlay:
  text "G" at 600,1315 h40
  text "-" at 1405,1270.01 h40
  text "." at 925,1120 h40
  text "R" at 755,1050 h40
  text "G" at 1275,1020 h40
  text "LPCO_V6.0.0" at 488.34,775 h40 r90
  text "V" at 685,735 h40
  text "+" at 725,668.34 h40
Bottom Overlay:
  text "G" at 1068.26,1201.25 h40
  text "V" at 854.2,1190.32 h40
  text "V" at 1364.2,1185.32 h40
  text "G" at 490,1125 h40
  text "G" at 780,1115 h40
  text "CS" at 505,1020 h40
  text "R" at 783.26,1016.25 h40
  text "C" at 485,915 h40
  text "V" at 785,810 h40
  text "V" at 829.2,640.32 h40
  text "R" at 695,540 h40
  text "D" at 885,455 h40
  text "V" at 1160,455 h40
  text "G" at 980,450 h40
  text "C" at 1085,450 h40

## Text inside footprints (layer, text, board x,y; h text height)
C_PWR1: Top Overlay "+" at 1190.48,757.08 h59.06 r270